# Altium PCB PCM2706.PcbDoc
Units mm, origin at the board's own origin, x right, y up, seen from the top; angles counter-clockwise.
Board outline 33.5 x 29 mm, 2 copper layers (Top Layer, Bottom Layer); 16 components, 17 nets, 97 pads, 6 vias.
Unrouted connection lines stored in the file: 2.
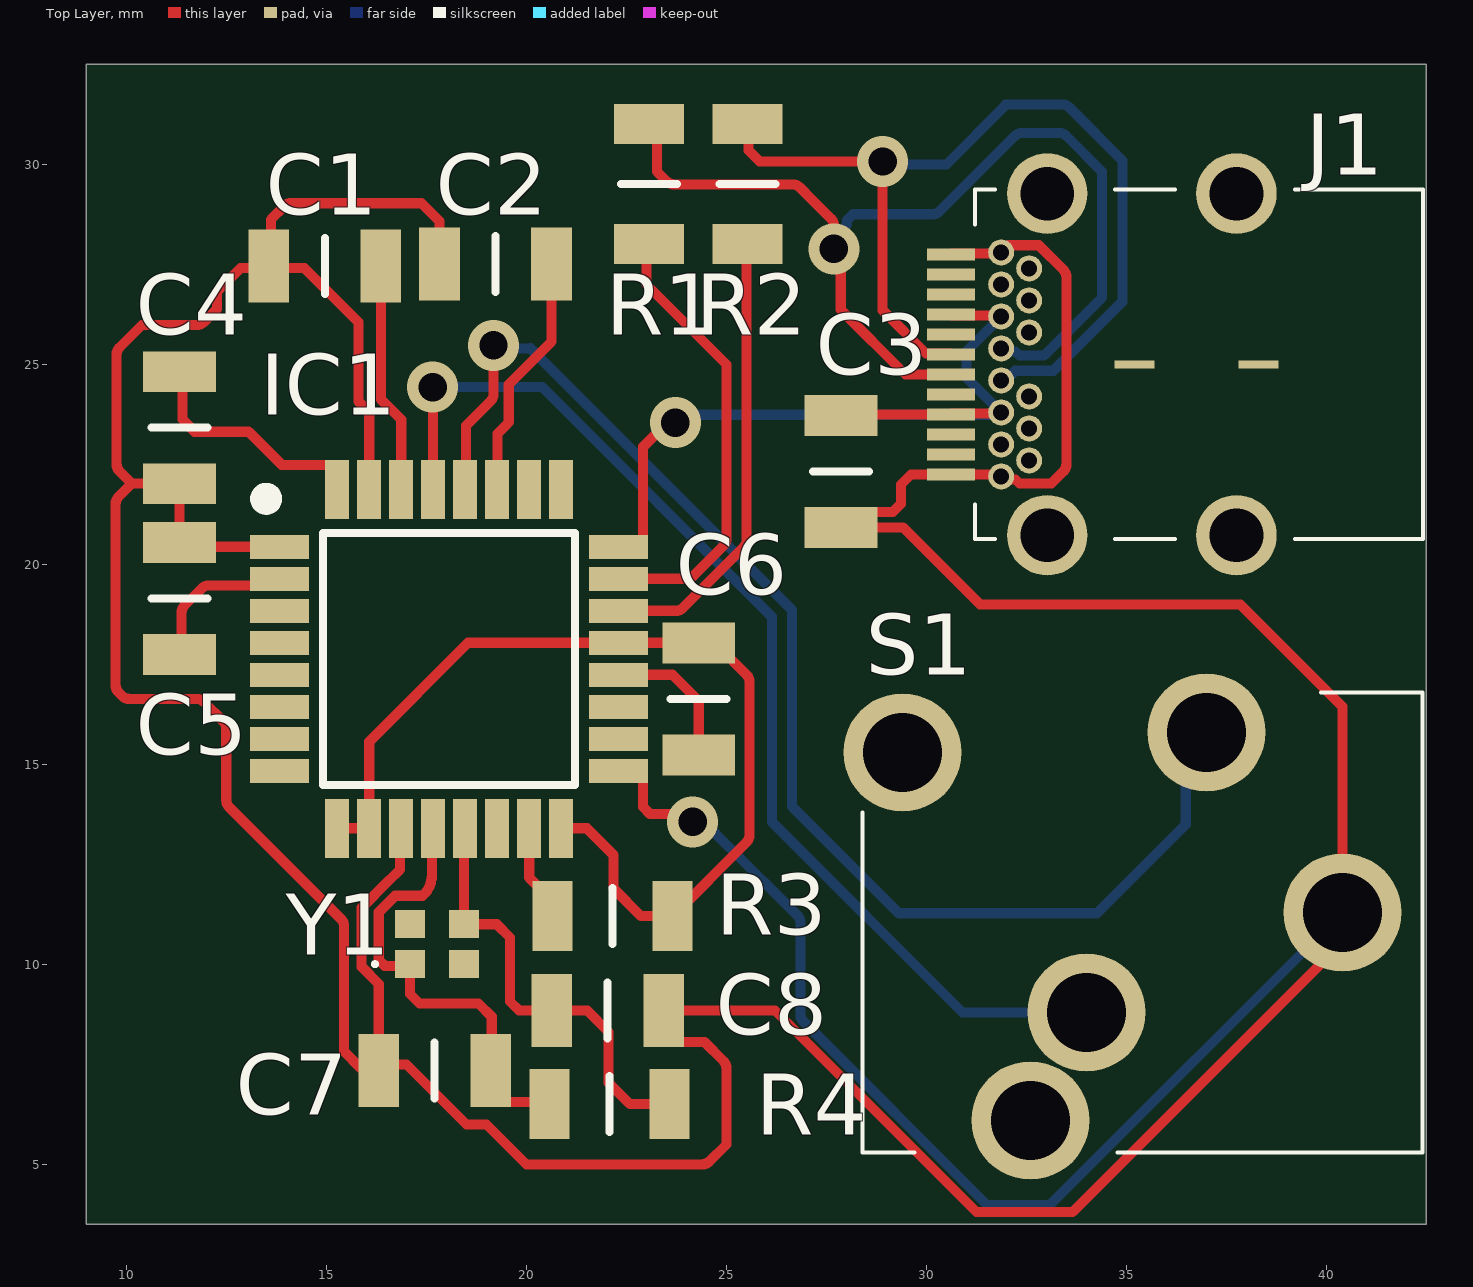
[diagram p0: Top Layer view]
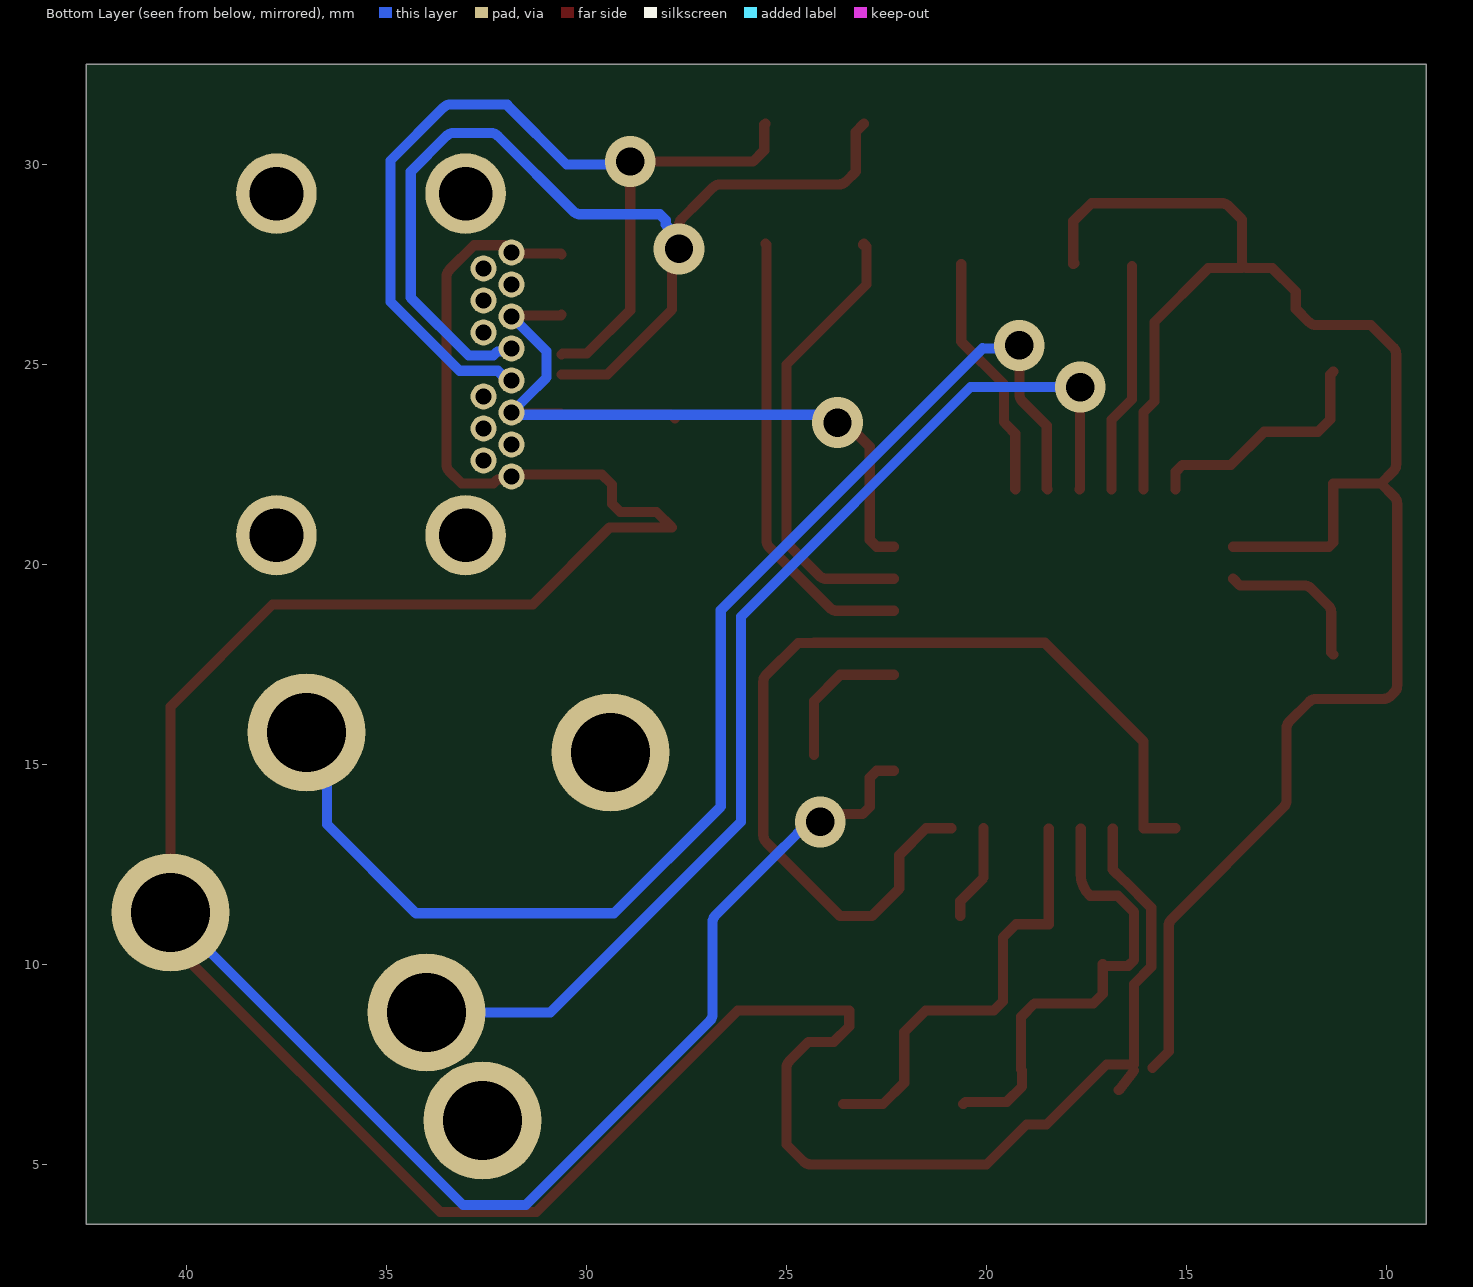
[diagram p1: Bottom Layer view, seen from below]
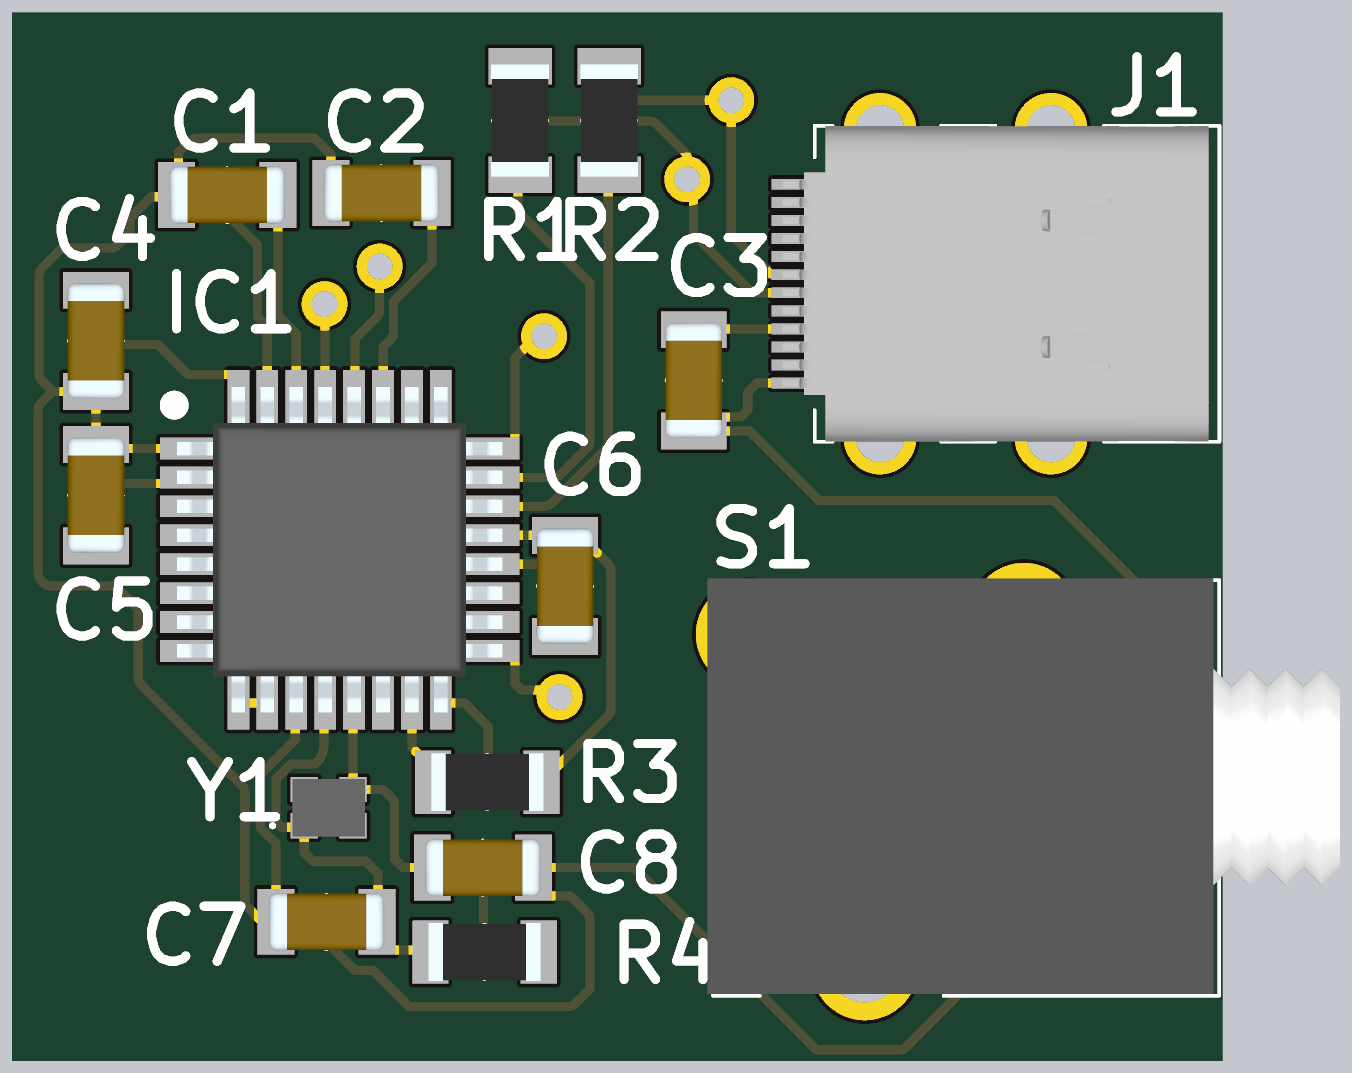
[diagram p2: 3D render of the assembled board from above, using the file's embedded part models]

## Layer stack, top to bottom
Top Solder: solder mask 0.0102, Solder Resist, Dk 3.5
Top Layer: signal copper 0.0356
Dielectric 1: dielectric 0.32, FR-4, Dk 4.8
Bottom Layer: signal copper 0.0356
Bottom Solder: solder mask 0.0102, Solder Resist, Dk 3.5

## Board outline
42.5,32.5 9,32.5 9,3.5 42.5,3.5

## Design rules (kind name [scope] priority, off if disabled: settings)
Clearance [All] p1: gap=0 ignorepadtopadclearanceinfootprint=FALSE
MinimumSolderMaskSliver [All] p1: minsoldermaskwidth=0
PolygonConnect [All] p1: connectstyle=Relief reliefconductorwidth=0.254 reliefentries=4 polygonreliefangle="90 Angle" airgapwidth=0.254
RoutingVias [All] p1: holewidth=0.711 width=1.27 viastyle="Through Hole" minholewidth=0.711 minwidth=1.27 maxholewidth=0.711 maxwidth=1.27
SolderMaskExpansion [All] p1: expansion=0.102 istentingtop=FALSE
Width [All] p1: maxlimit=0.254 minlimit=0.1 preferedwidth=0.127
29 further rules are at their usual default settings.

## Components (designator, comment, footprint, x,y, rotation, side; value= is the part's Value field where it differs from the comment)
C1 "1uF" CAPC3216X229N 14.961,27.457 r180 top
C2 "1uF" CAPC3216X229N 19.228,27.508 r0 top
C3 "1uF" CAPC3216X229N 27.864,22.327 r90 top
C4 "10uF" CAPC3216X229N 11.328,23.419 r90 top
C5 "1uF" CAPC3216X229N 11.328,19.149 r90 top
C6 "1uF" CAPC3216X229N 24.308,16.637 r90 top
C7 "10pF" CAPC3216X229N 17.707,7.347 r0 top
C8 "10pF" CAPC3216X229N 22.031,8.846 r180 top
IC1 "PCM2706PJT" QFP80P900X900X120-32N 18.069,17.641 r0 top
J1 "TypeC" 632723300011 36.515,25 r90 top
R1 "22" RESC3116X65N 23.063,29.515 r90 top
R2 "22" RESC3116X65N 25.527,29.516 r90 top
R3 "1.5k" RESC3116X65N 22.155,11.208 r0 top
R4 "1M" RESC3116X65N 22.08,6.509 r0 top
S1 "35RAPC4BH3" 35RAPC4BH3 40.4,11.3 r180 top
Y1 "12M" XRCGB24M000F2P00R0 17.765,10.505 r0 top

## Footprints (in the part's own frame and the unit in brackets; to place one, negate y for a bottom-side part, rotate by r counter-clockwise, add the part's x,y. Pads: shape width x height; smd on the part's side, far side on the other; paste and mask are expansions set on the pad)
35RAPC4BH3 [mm]
  round 2.955 hole 1.97: 1(0,0) 2(7.8,5.2) 3(6.4,2.5) 4(11,-4) 5(3.4,-4.5)
  silkscreen extent -2,-5.5 12,6, body extent -5.34,-5.55 12.16,5.95, height 6.1
632723300011 [mm]
  round 0.65 hole 0.4: 1(2,4.645) 2(-2,4.645) B1(2.8,4.645) B2(2.4,3.945) B3(1.6,3.945) B4(1.2,4.645) B5(0.8,3.945) B6(0.4,4.645) B7(-0.4,4.645) B8(-0.8,3.945) B9(-1.2,4.645) B10(-1.6,3.945) B11(-2.4,3.945) B12(-2.8,4.645)
  round 2.012 hole 1.342: 3(4.27,3.495) 4(-4.27,3.495) 5(4.27,-1.235) 6(-4.27,-1.235)
  rect 0.2x1 smd: 7(0,1.315) 8(0,-1.785)
  rect 0.3x1.2 smd: A1(-2.75,5.895) A2(-2.25,5.895) A3(-1.75,5.895) A4(-1.25,5.895) A5(-0.75,5.895) A6(-0.25,5.895) A7(0.25,5.895) A8(0.75,5.895) A9(1.25,5.895) A10(1.75,5.895) A11(2.25,5.895) A12(2.75,5.895)
  silkscreen extent -4.37,-5.89 4.37,5.31, body extent -4.37,-5.6 4.37,6.2, height 3.09
CAPC3216X229N [mm]
  rect 1.02x1.82 smd: 1(-1.4,0) 2(1.4,0)
  silkscreen extent 0,-0.7 0,0.7, body extent -1.6,-0.8 1.6,0.8, height 2.29
QFP80P900X900X120-32N [mm]
  rect 1.475x0.6 smd: 1(-4.238,2.8) 2(-4.238,2) 3(-4.238,1.2) 4(-4.238,0.4) 5(-4.238,-0.4) 6(-4.238,-1.2) 7(-4.238,-2) 8(-4.238,-2.8) 17(4.238,-2.8) 18(4.238,-2) 19(4.238,-1.2) 20(4.238,-0.4) 21(4.238,0.4) 22(4.238,1.2) 23(4.238,2) 24(4.238,2.8)
  rect 0.6x1.475 smd: 9(-2.8,-4.238) 10(-2,-4.238) 11(-1.2,-4.238) 12(-0.4,-4.238) 13(0.4,-4.238) 14(1.2,-4.238) 15(2,-4.238) 16(2.8,-4.238) 25(2.8,4.238) 26(2,4.238) 27(1.2,4.238) 28(0.4,4.238) 29(-0.4,4.238) 30(-1.2,4.238) 31(-2,4.238) 32(-2.8,4.238)
  silkscreen extent -4.77,-3.15 3.15,4.2, body extent -4.5,-4.5 4.5,4.5, height 1.2
RESC3116X65N [mm]
  rect 1x1.75 smd: 1(-1.5,0) 2(1.5,0)
  silkscreen extent 0,-0.7 0,0.7, body extent -1.55,-0.8 1.55,0.8, height 0.65
XRCGB24M000F2P00R0 [mm]
  rect 0.75x0.7 smd: 1(-0.675,-0.5) 2(0.675,-0.5) 3(0.675,0.5) 4(-0.675,0.5)
  silkscreen extent -1.6,-0.55 -1.5,-0.45, body extent -1,-0.8 1,0.8, height 0.8

## Part data
C1 C2 C3 C4 C5 C6 C7 C8: library part 1206DD106KAT2A, "Capacitor", Manufacturer_Name=AVX, Mouser Part Number=581-1206DD106KAT2A, Arrow Part Number=1206DD106KAT2A, Arrow Price/Stock=https://www.arrow.com/en/products/1206dd106kat2a/avx, Datasheet Link=http://datasheets.avx.com/cx5r.pdf, Height=2.29mm, Manufacturer_Part_Number=1206DD106KAT2A, Mouser Price/Stock=https://www.mouser.co.uk/ProductDetail/AVX/1206DD106KAT2A?qs=lhAPX%252BE7qEb%2Fwkl82gv0Wg%3D%3D
IC1: "Integrated Circuit", Manufacturer_Name="Texas Instruments", Mouser Part Number=595-PCM2706PJT, Arrow Part Number=PCM2706PJT, Arrow Price/Stock=https://www.arrow.com/en/products/pcm2706pjt/texas-instruments?region=nac, Datasheet Link=http://www.ti.com/lit/gpn/pcm2706, Height=1.2mm, Manufacturer_Part_Number=PCM2706PJT, Mouser Price/Stock=https://www.mouser.co.uk/ProductDetail/Texas-Instruments/PCM2706PJT?qs=wgAEGBTxy7mjI4tusM1abw%3D%3D
J1: library part 632723300011, "Connector", Manufacturer_Name="Wurth Elektronik", Mouser Part Number=710-632723300011, Datasheet Link=http://katalog.we-online.de/em/datasheet/632723x00011.pdf, Height=2mm, Manufacturer_Part_Number=632723300011, Mouser Price/Stock=https://www.mouser.co.uk/ProductDetail/Wurth-Elektronik/632723300011?qs=NK6InXoXhq4%252B5eM1PePLPg%3D%3D
R1 R2 R3 R4: library part RC1206FR-072K49L, "Resistor", Manufacturer_Name="YAGEO (PHYCOMP)", Mouser Part Number=603-RC1206FR-072K49L, Arrow Part Number=RC1206FR-072K49L, Arrow Price/Stock=https://www.arrow.com/en/products/rc1206fr-072k49l/yageo?region=nac, Datasheet Link=https://www.yageo.com/upload/media/product/productsearch/datasheet/rchip/PYu-RC_Group_51_RoHS_L_10.pdf, Height=0.65mm, Manufacturer_Part_Number=RC1206FR-072K49L, Mouser Price/Stock=https://www.mouser.co.uk/ProductDetail/YAGEO/RC1206FR-072K49L?qs=fiyQ2z0a5enkp4BEXpmN7g%3D%3D
S1: "Switch", Manufacturer_Name=Switchcraft, Mouser Part Number=502-35RAPC4BH3, Arrow Part Number=35RAPC4BH3, Arrow Price/Stock=https://www.arrow.com/en/products/35rapc4bh3/switchcraft, Datasheet Link=http://www.switchcraft.com/Drawings/35rapc__h3_cd.pdf, Height=6mm, Manufacturer_Part_Number=35RAPC4BH3, Mouser Price/Stock=https://www.mouser.co.uk/ProductDetail/Switchcraft/35RAPC4BH3?qs=I3kMT7EEIOWFGyk5rynRAQ%3D%3D
Y1: library part XRCGB24M000F2P00R0, "Crystal or Oscillator", Manufacturer_Name="Murata Electronics", Mouser Part Number=81-XRCGB24M000F2P0R0, Arrow Part Number=XRCGB24M000F2P00R0, Arrow Price/Stock=https://www.arrow.com/en/products/xrcgb24m000f2p00r0/murata-manufacturing, Datasheet Link=https://www.murata.com/products/productdata/8801075560478/SPEC-XRCGB24M000F2P00R0.pdf?1541043009000, Height=0.7mm, Manufacturer_Part_Number=XRCGB24M000F2P00R0, Mouser Price/Stock=https://www.mouser.com/Search/Refine.aspx?Keyword=81-XRCGB24M000F2P0R0

## Via types
v1: diameter 1.27, hole 0.711, Top Layer to Bottom Layer, 6 vias

## Nets (pads, with @x,y where several pads share a name; then routed paths per layer and width w, separated by ;. In a path a pad name is that pad's centre, name@x,y a point inside that pad or via, vN(x,y) a via of type N, cw(c..) or ccw(c..) an arc to the next point about the centre after c; other vN are vias at no path point)
GND: C1.2 C2.1 C3.1 C4.1 C5.2 C7.1 C8.1 IC1.1 IC1.11 IC1.17 IC1.25 IC1.26 IC1.31 J1.A1 J1.A12 J1.B1 J1.B12 S1.1 | length 152
  Top Layer w0.254: IC1.1 11.436,20.441 C5.2 C4.1 11.325,22.022 10.135,22.022 ; C7.1@15.85,7.417 15.443,7.823 15.443,10.952 ccw(c15.189,10.952) 15.369,11.131 12.572,13.928 cw(c12.752,14.107) 12.498,14.107 12.498,15.897 ccw(c12.244,15.897) 12.423,16.077 11.937,16.563 ccw(c11.758,16.383) 11.758,16.637 10.073,16.637 cw(c10.073,16.891) 9.894,16.711 9.803,16.803 cw(c9.982,16.982) 9.728,16.982 9.728,21.51 cw(c9.982,21.51) 9.803,21.69 10.135,22.022 ; IC1.31 16.069,23.809 15.799,24.079 15.799,26.06 14.453,27.407 13.611,27.407 C1.2 ; C7.1 C7.1@16.69,6.859 ; IC1.11@16.84,13.396 16.84,12.37 16.566,12.096 16.558,12.096 15.881,11.419 15.881,9.938 16.307,9.512 16.307,7.5 17,7.5 18.5,6 19,6 20,5 24.395,5 ccw(c24.395,5.254) 24.574,5.074 25,5.5 25,7.407 ccw(c24.746,7.407) 24.926,7.586 24.449,8.063 23.814,8.063 23.431,8.446 C8.1 26.217,8.846 31.253,3.81 33.655,3.81 40.615,10.77 40.615,11.085 S1.1 40.4,16.445 37.846,18.999 31.344,18.999 29.416,20.927 C3.1 28.247,21.31 29.158,21.31 29.362,21.514 29.362,21.996 29.616,22.25 J1.A1 ; C2.1@17.805,27.531 C2.1 17.828,28.578 17.375,29.031 14.125,29.031 ccw(c14.125,28.777) 13.945,28.956 13.614,28.626 13.614,27.511 C1.2 ; IC1.17 22.745,14.841 22.918,14.668 22.918,13.937 23.097,13.758 23.961,13.758 v1(24.155,13.564) ; J1.A12 30.643,27.773 31.843,27.773 J1.B1 ; J1.A1 31.82,22.25 J1.B12 31.946,22.124 32.227,22.124 32.33,22.021 33.121,22.021 33.426,22.326 ccw(c33.246,22.505) 33.5,22.505 33.5,27.184 ccw(c33.246,27.184) 33.426,27.363 32.81,27.979 32.054,27.979 J1.B1@31.825,27.75 ; 10.135,22.022 9.828,22.328 cw(c10.008,22.508) 9.754,22.508 9.754,25.245 cw(c10.008,25.244) 9.827,25.423 10.389,25.984 11.757,25.984 ccw(c11.757,26.238) 11.936,26.058 12.267,26.39 12.267,26.821 12.852,27.407 13.51,27.407 C1.2
  Bottom Layer w0.254: v1(24.155,13.564) 24.43,13.564 25.059,12.935 25.065,12.935 26.773,11.227 cw(c26.594,11.047) 26.848,11.047 26.848,8.757 ccw(c27.102,8.757) 26.922,8.578 31.515,3.985 33.085,3.985 S1.1
NetC1_1: C1.1 IC1.30 | length 5.8
  Top Layer w0.254: C1.1 16.361,24.131 16.869,23.622 IC1.30
NetC2_2: C2.2 IC1.27 | length 6.2
  Top Layer w0.254: IC1.27 19.279,21.888 19.279,23.266 19.5,23.488 19.5,23.5 19.558,23.558 19.558,24.5 20.628,25.57 C2.2
NetC4_2: C4.2 IC1.32 | length 6.1
  Top Layer w0.254: C4.2 11.405,24.743 11.405,23.622 11.709,23.317 13.056,23.317 13.884,22.489 15.096,22.489 15.269,22.316 IC1.32
NetC5_1: C5.1 IC1.2 | length 3.9
  Top Layer w0.254: C5.1 11.379,17.799 11.379,18.794 cw(c11.633,18.792) 11.453,18.971 11.881,19.399 cw(c12.06,19.219) 12.059,19.473 ; 12.06,19.473 13.664,19.473 IC1.2
NetC6_1: C6.1 IC1.20 | length 3.6
  Top Layer w0.254: IC1.20 23.653,17.241 24.308,16.586 C6.1
NetC7_2: C7.2 IC1.12 R4.1 Y1.1 | length 11.5
  Top Layer w0.254: Y1.1@17.075,9.964 16.455,9.964 16.307,10.112 16.307,11.306 16.717,11.716 17.403,11.716 17.508,11.821 17.508,11.828 ccw(c16.87,12.26) 17.64,12.26 IC1.12@17.64,13.396 ; Y1.1 17.09,9.263 17.329,9.024 18.802,9.024 19.132,8.694 19.132,7.373 C7.2 19.107,6.947 19.49,6.564 20.525,6.564 R4.1
NetC8_2: C8.2 IC1.13 R4.2 Y1.3 | length 11.1
  Top Layer w0.254: IC1.13@18.44,13.396 Y1.3 19.259,11.005 19.59,10.675 19.59,9.075 19.818,8.846 C8.2 21.52,8.846 22.053,8.313 22.053,7.043 22.587,6.509 R4.2
NetIC1_15: IC1.15 R3.1 | length 2.4
  Top Layer w0.254: IC1.15 20.069,12.169 20.655,11.583 R3.1
NetIC1_22: IC1.22 R2.1 | length 11.4
  Top Layer w0.254: IC1.22 23.735,18.841 ccw(c23.735,19.095) 23.914,18.914 25.428,20.428 ccw(c25.248,20.607) 25.502,20.606 25.502,27.991 R2.1
NetIC1_23: IC1.23 R1.1 | length 11.4
  Top Layer w0.254: IC1.23 23.997,19.641 ccw(c23.997,19.895) 24.176,19.714 24.926,20.465 ccw(c24.746,20.644) 25,20.644 25,25 23,27 23,27.952 R1.1 R1.1@23.088,27.99 ; R1.1@23.088,27.99 cw(c22.908,27.811) R1.1@23.089,27.989
NetIC1_28: IC1.28 S1.5 | length 33.4
  Top Layer w0.254: IC1.28 18.491,21.9 18.491,23.47 19.103,24.081 ccw(c18.923,24.261) 19.177,24.261 v1(19.177,25.476)
  Bottom Layer w0.254: v1(19.177,25.476) 19.253,25.4 20.091,25.4 ; 20.096,25.404 26.644,18.856 26.644,13.946 29.312,11.278 34.265,11.278 36.483,13.496 36.483,15.283 S1.5
NetIC1_29: IC1.29 S1.3 | length 28.4
  Top Layer w0.254: v1(17.653,24.435) 17.661,24.427 17.661,21.887 IC1.29
  Bottom Layer w0.254: v1(17.653,24.435) 20.396,24.435 26.137,18.694 26.137,13.564 30.9,8.8 S1.3
NetJ1_A6: J1.A6 J1.B6 R1.2 | length 26.7
  Top Layer w0.254: R1.2 23.266,30.812 23.266,29.82 23.512,29.574 ccw(c23.691,29.754) 23.691,29.5 26.656,29.5 cw(c26.656,29.246) 26.835,29.426 27.154,29.107 27.612,28.649 cw(c27.432,28.47) v1@27.686,28.471 ; v1@27.686,28.47 v1(27.686,27.889) 27.86,27.715 27.86,26.369 29.479,24.75 J1.A6
  Bottom Layer w0.254: v1(27.686,27.889) 27.686,28.164 28.016,28.494 28.016,28.604 28.165,28.753 30.148,28.753 ccw(c30.148,29.007) 30.327,28.827 32.211,30.711 cw(c32.39,30.531) 32.389,30.785 ; J1.B6 31.946,25.324 32.227,25.324 32.33,25.221 32.943,25.221 34.392,26.67 34.392,29.82 33.501,30.71 ccw(c33.321,30.531) 33.321,30.785 32.39,30.785
NetJ1_A7: J1.A7 J1.B7 R2.2 | length 24.9
  Top Layer w0.254: R2.2 25.552,30.991 25.552,30.353 25.832,30.074 v1(28.905,30.074) 28.905,26.356 29.988,25.273 30.597,25.273 J1.A7
  Bottom Layer w0.254: v1@28.956,30.353 28.905,30.302 v1(28.905,30.074) 28.979,30 30.5,30 31.978,31.478 31.978,31.5 33.393,31.5 cw(c33.393,31.246) 33.573,31.426 34.9,30.099 34.9,26.568 33.171,24.84 32.217,24.84 31.977,24.6 J1.B7
VCC: C3.2 IC1.24 J1.A4 J1.A9 J1.B4 J1.B9 | length 20.9
  Top Layer w0.254: IC1.24 22.745,20.441 22.918,20.614 22.918,22.943 23.52,23.546 v1(23.724,23.546) ; C3.2@27.788,23.65 C3.2 27.887,23.75 J1.A4 30.643,23.773 31.843,23.773 J1.B9 ; J1.A9 30.643,26.227 31.843,26.227 J1.B4
  Bottom Layer w0.254: v1(23.724,23.546) 23.918,23.74 31.81,23.74 J1.B9 31.736,23.934 31.497,24.173 31,24.67 31,25.33 J1.B4
VDD: C6.2 IC1.9 IC1.10 IC1.16 IC1.21 R3.2 | length 24.8
  Top Layer w0.254: IC1.9 IC1.10 16.069,15.569 18.541,18.041 IC1.21 24.304,18.041 C6.2 24.708,18.037 25.503,17.241 cw(c25.324,17.062) 25.578,17.062 25.578,13.894 25.578,13.236 cw(c25.324,13.236) 25.503,13.057 R3.2 22.866,11.208 22.18,11.894 22.18,12.732 21.51,13.403 IC1.16
pads on no net: IC1.3 IC1.4 IC1.5 IC1.6 IC1.7 IC1.8 IC1.14 IC1.18 IC1.19 J1.1 J1.2 J1.3 J1.4 J1.5 J1.6 J1.7 J1.8 J1.A2 J1.A3 J1.A5 J1.A8 J1.A10 J1.A11 J1.B2 J1.B3 J1.B5 J1.B8 J1.B10 J1.B11 S1.2 S1.4 Y1.2 Y1.4